# Altium PCB nema17-knockout.PcbDoc (part 1 of 3)
Units mm, origin at the board's own origin, x right, y up, seen from the top; angles counter-clockwise.
Board outline 42.3 x 42.32 mm, 2 copper layers (Top, Bottom), stack 0 mm thick; 130 components, 82 nets, 394 pads, 273 vias.
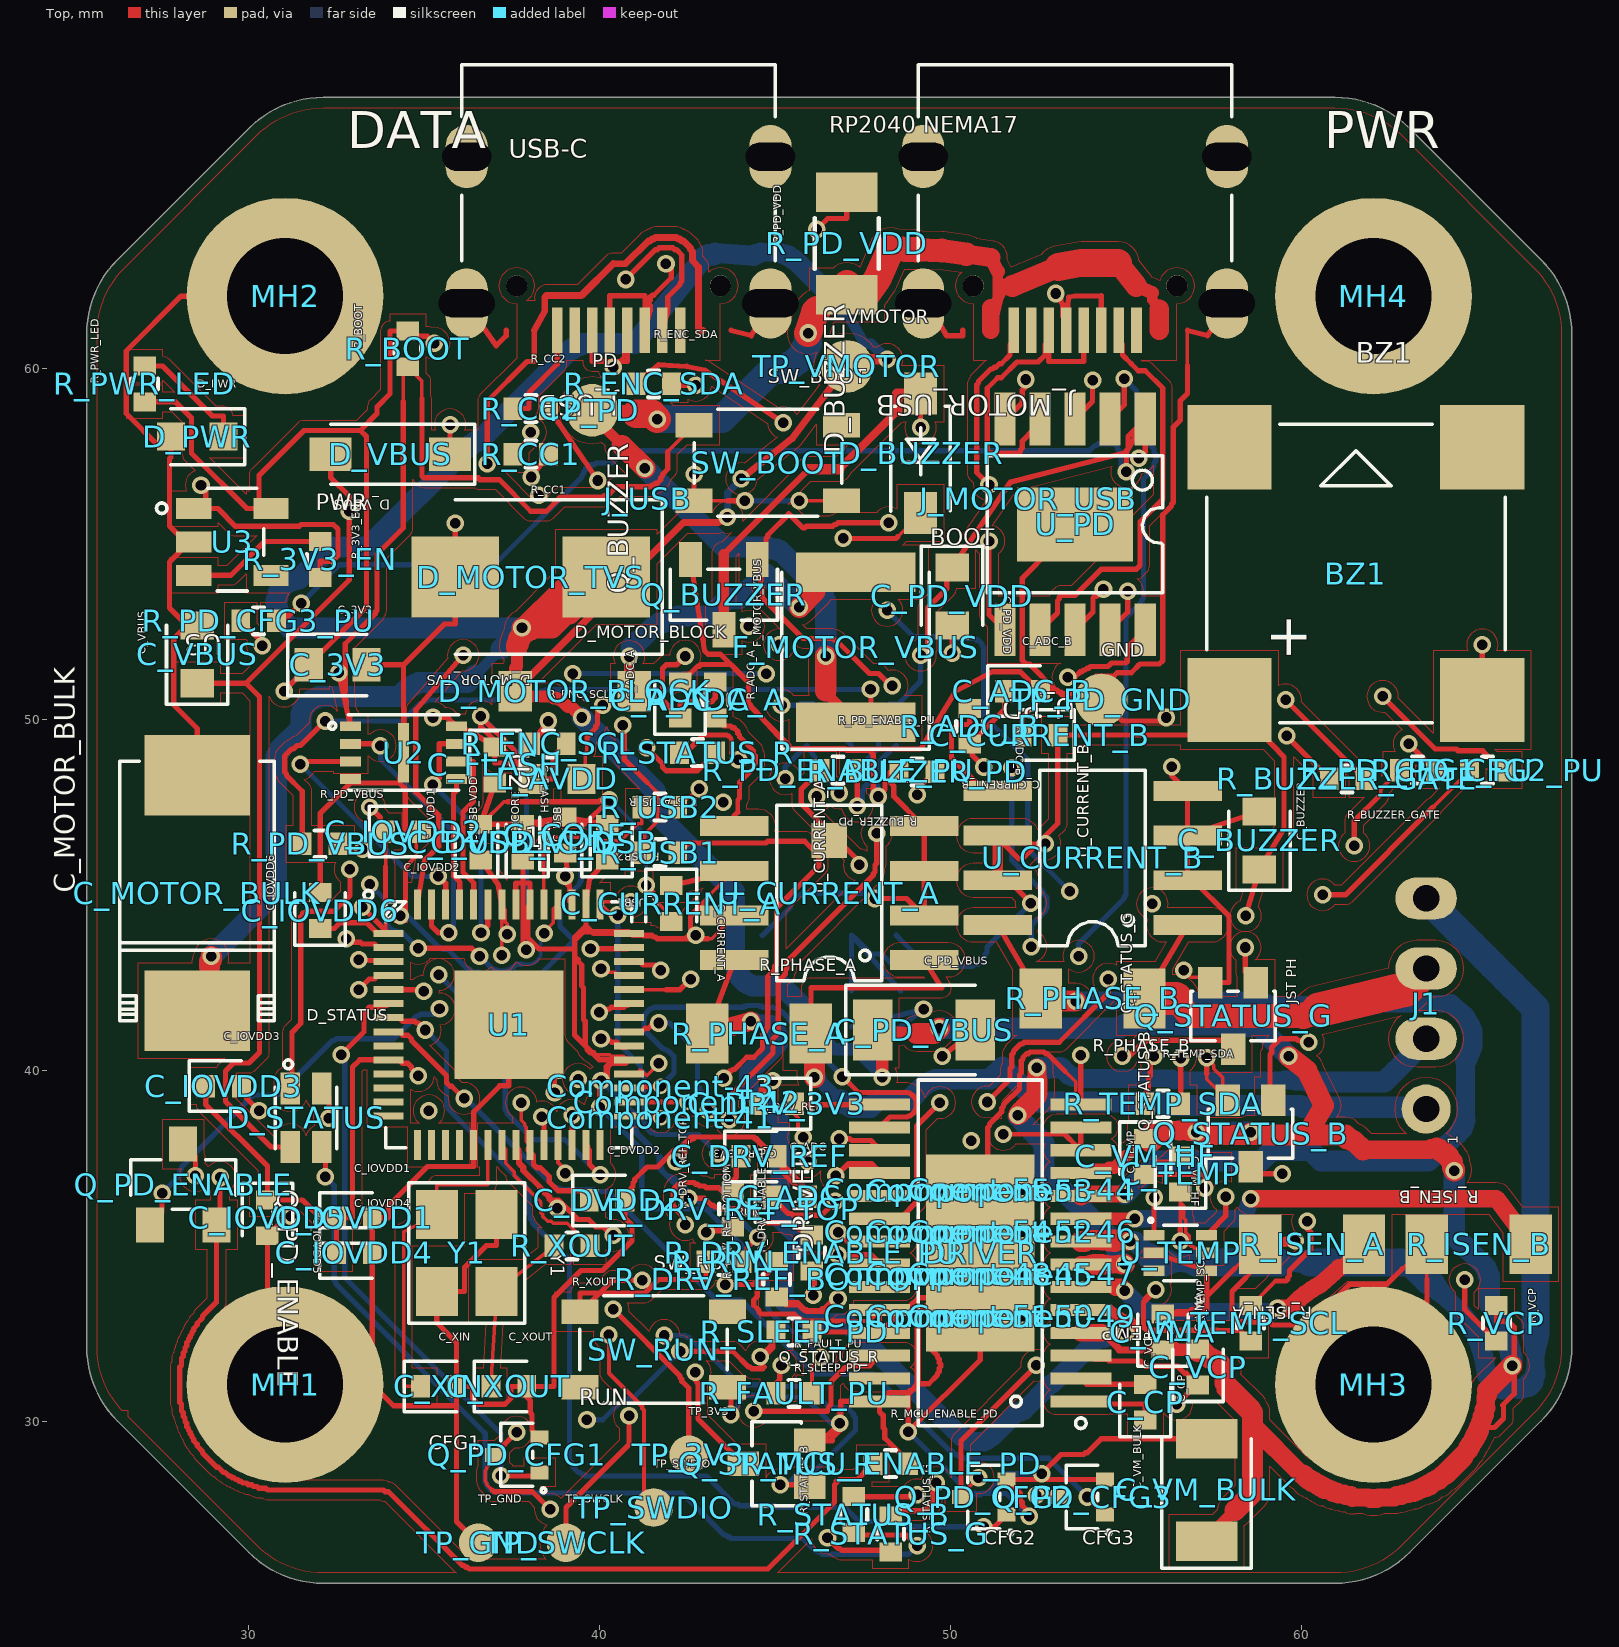
[diagram p0: Top view]
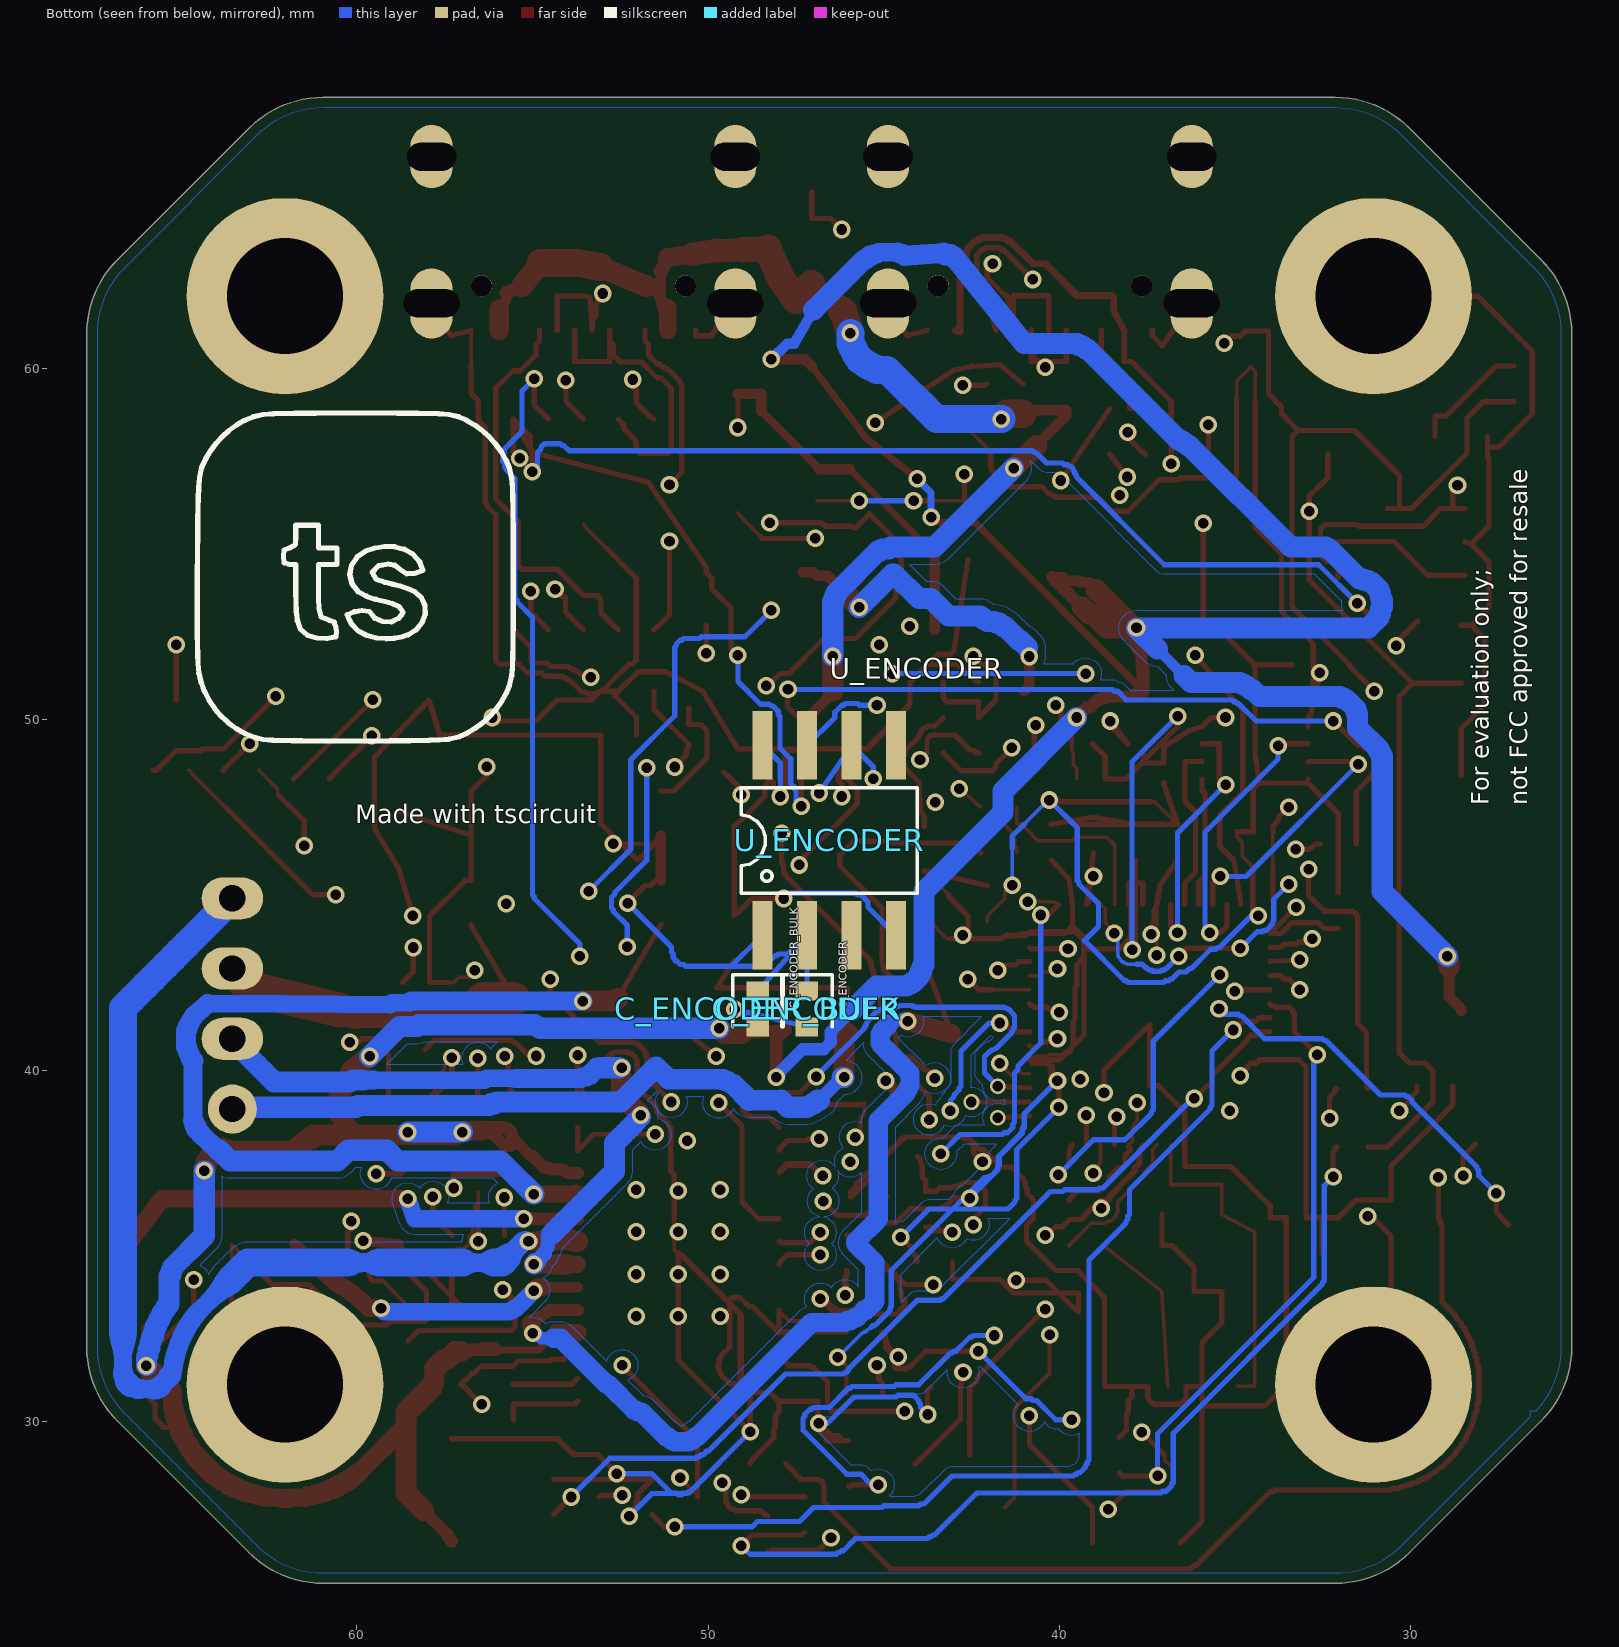
[diagram p1: Bottom view, seen from below]

## Layer stack, top to bottom

## Board outline
26.279,30.021 30.021,26.279 30.165,26.144 30.316,26.02 30.476,25.906 30.643,25.802 30.816,25.709 30.995,25.628 31.178,25.559 31.366,25.502 31.557,25.458 31.751,25.426 31.946,25.406 32.143,25.4 60.957,25.4 61.154,25.406 61.349,25.426 61.543,25.458 61.734,25.502 61.922,25.559 62.105,25.628 62.284,25.709 62.457,25.802 62.624,25.906 62.784,26.02 62.935,26.144 63.079,26.279 66.821,30.021 66.956,30.165 67.08,30.316 67.194,30.476 67.298,30.643 67.391,30.816 67.472,30.995 67.541,31.178 67.598,31.366 67.642,31.557 67.674,31.751 67.694,31.946 67.7,32.143 67.7,60.977 67.694,61.174 67.674,61.369 67.642,61.563 67.598,61.754 67.541,61.942 67.472,62.125 67.391,62.304 67.298,62.477 67.194,62.644 67.08,62.804 66.956,62.955 66.821,63.099 63.079,66.841 62.935,66.976 62.784,67.1 62.624,67.214 62.457,67.318 62.284,67.411 62.105,67.492 61.922,67.561 61.734,67.618 61.543,67.662 61.349,67.694 61.154,67.714 60.957,67.72 32.143,67.72 31.946,67.714 31.751,67.694 31.557,67.662 31.366,67.618 31.178,67.561 30.995,67.492 30.816,67.411 30.643,67.318 30.476,67.214 30.316,67.1 30.165,66.976 30.021,66.841 26.279,63.099 26.144,62.955 26.02,62.804 25.906,62.644 25.802,62.477 25.709,62.304 25.628,62.125 25.559,61.942 25.502,61.754 25.458,61.563 25.426,61.369 25.406,61.174 25.4,60.977 25.4,32.143 25.406,31.946 25.426,31.751 25.458,31.557 25.502,31.366 25.559,31.178 25.628,30.995 25.709,30.816 25.802,30.643 25.906,30.476 26.02,30.316 26.144,30.165 26.279,30.021

## Components (designator, comment, footprint, x,y, rotation, side; value= is the part's Value field where it differs from the comment)
BZ1 "" TSCIRCUIT-9.5997x9.5999mm 61.55,54.16 r0 top
C_3V3 "" TSCIRCUIT-2.4500x0.9500mm 32.55,51.56 r0 top
C_ADC "" TSCIRCUIT-1.5600x0.6400mm 45.425,36.41 r0 top
C_ADC_A "" TSCIRCUIT-0.6400x1.5600mm#1 42.3,50.56 r90 top
C_ADC_B "" TSCIRCUIT-1.5600x0.6400mm 52.05,50.81 r0 top
C_BUZZER "" TSCIRCUIT-0.9500x2.4500mm 58.8,46.56 r90 top
C_CORE "" TSCIRCUIT-0.6400x1.5600mm#1 39.025,46.71 r90 top
C_CP "" TSCIRCUIT-0.6400x1.5600mm#1 55.55,30.56 r90 top
C_CURRENT_A "" TSCIRCUIT-0.6400x1.5600mm#1 42.05,44.76 r270 top
C_CURRENT_B "" TSCIRCUIT-1.5600x0.6400mm 52.55,49.56 r180 top
C_DRV_3V3 "" TSCIRCUIT-1.5600x0.6400mm 45.05,39.06 r180 top
C_DRV_REF "" TSCIRCUIT-1.5600x0.6400mm 44.55,37.56 r0 top
C_DVDD1 "" TSCIRCUIT-0.6400x1.5600mm#1 36.625,46.51 r90 top
C_DVDD2 "" TSCIRCUIT-1.5600x0.6400mm 40.225,36.31 r0 top
C_ENCODER "" TSCIRCUIT-0.6400x1.5600mm#2 47.185,41.76 r90 bottom
C_ENCODER_BULK "" TSCIRCUIT-0.6400x1.5600mm#2 48.585,41.76 r90 bottom
C_FLASH "" TSCIRCUIT-0.6400x1.5600mm#1 37.025,48.71 r270 top
C_IOVDD1 "" TSCIRCUIT-1.5600x0.6400mm 33.025,35.81 r0 top
C_IOVDD2 "" TSCIRCUIT-1.5600x0.6400mm 34.425,46.81 r0 top
C_IOVDD3 "" TSCIRCUIT-1.5600x0.6400mm 29.3,39.56 r0 top
C_IOVDD4 "" TSCIRCUIT-1.5600x0.6400mm 33.025,34.81 r0 top
C_IOVDD5 "" TSCIRCUIT-0.6400x1.5600mm#1 30.55,35.81 r270 top
C_IOVDD6 "" TSCIRCUIT-0.6400x1.5600mm#1 32.05,44.56 r90 top
C_MOTOR_BULK "" TSCIRCUIT-3x9.0048mm 28.55,45.06 r90 top
C_PD_VBUS "" TSCIRCUIT-4.0500x1.7500mm 49.25,41.16 r0 top
C_PD_VDD "" TSCIRCUIT-0.9500x2.4500mm 50.05,53.51 r270 top
C_TEMP "" TSCIRCUIT-0.6400x1.5600mm#1 56.55,37.06 r90 top
C_USB "" TSCIRCUIT-0.6400x1.5600mm#1 40.225,46.51 r90 top
C_USB_VDD "" TSCIRCUIT-0.6400x1.5600mm#1 37.825,46.51 r90 top
C_VBUS "" TSCIRCUIT-0.9500x2.4500mm 28.55,51.86 r90 top
C_VCP "" TSCIRCUIT-0.6400x1.5600mm#1 57.05,31.56 r90 top
C_VM_BULK "" TSCIRCUIT-1.7500x4.0500mm 57.3,28.06 r90 top
C_VM_HF "" TSCIRCUIT-0.6400x1.5600mm#1 55.55,37.56 r270 top
C_VMA "" TSCIRCUIT-0.6400x1.5600mm#1 56.05,32.56 r90 top
C_XIN "" TSCIRCUIT-1.5600x0.6400mm 35.425,31.01 r0 top
C_XOUT "" TSCIRCUIT-1.5600x0.6400mm 37.425,31.01 r0 top
Component-41 "" TSCIRCUIT-0.4500x0.4500mm 41.75,38.659 r0 top
Component-42 "" TSCIRCUIT-0.4500x0.4500mm 42.5,39.109 r0 top
Component-43 "" TSCIRCUIT-0.4500x0.4500mm 41.75,39.56 r0 top
Component-44 "" TSCIRCUIT-0.5000x0.5000mm 52.05,36.61 r0 top
Component-45 "" TSCIRCUIT-0.5000x0.5000mm 50.85,34.21 r0 top
Component-46 "" TSCIRCUIT-0.5000x0.5000mm 52.05,35.41 r0 top
Component-47 "" TSCIRCUIT-0.5000x0.5000mm 52.05,34.21 r0 top
Component-48 "" TSCIRCUIT-0.5000x0.5000mm 49.65,34.21 r0 top
Component-49 "" TSCIRCUIT-0.5000x0.5000mm 52.05,33.01 r0 top
Component-50 "" TSCIRCUIT-0.5000x0.5000mm 50.85,33.01 r0 top
Component-51 "" TSCIRCUIT-0.5000x0.5000mm 49.65,33.01 r0 top
Component-52 "" TSCIRCUIT-0.5000x0.5000mm 50.85,35.41 r0 top
Component-53 "" TSCIRCUIT-0.5000x0.5000mm 50.85,36.588 r0 top
Component-54 "" TSCIRCUIT-0.5000x0.5000mm 49.65,35.41 r0 top
Component-55 "" TSCIRCUIT-0.5000x0.5000mm 49.65,36.61 r0 top
D_BUZZER "" TSCIRCUIT-0.9500x4.6000mm 49.15,57.585 r90 top
D_MOTOR_BLOCK "" TSCIRCUIT-4.3348x1.1500mm 39.3,50.81 r0 top
D_MOTOR_TVS "" TSCIRCUIT-6.8000x2.3000mm 38.05,54.06 r180 top
D_PWR "" TSCIRCUIT-2.2980x0.8000mm 28.55,58.06 r0 top
D_STATUS "" TSCIRCUIT-1.4502x2.5840mm 31.65,38.66 r0 top
D_VBUS "" TSCIRCUIT-4.6000x0.9500mm 34.05,57.56 r180 top
DRIVER "" TSCIRCUIT-7.4630x8.7931mm 50.85,34.81 r90 top
F_MOTOR_VBUS "" TSCIRCUIT-3.4000x5.4000mm 47.3,52.06 r90 top
J1 "" TSCIRCUIT-1.7500x7.3000mm 63.55,41.86 r90 top
J_MOTOR_USB "" TSCIRCUIT-9.8502x6.4982mm#1 53.55,63.685 r180 top
J_USB "" TSCIRCUIT-9.8502x6.4982mm#2 40.55,63.685 r180 top
L_AVDD "" TSCIRCUIT-2.1998x0.8640mm 38.8,48.31 r0 top
MH1 "" TSCIRCUIT-5.6000x5.6000mm 31.05,31.06 r0 top
MH2 "" TSCIRCUIT-5.6000x5.6000mm 31.05,62.06 r0 top
MH3 "" TSCIRCUIT-5.6000x5.6000mm 62.05,31.06 r0 top
MH4 "" TSCIRCUIT-5.6000x5.6000mm 62.05,62.06 r0 top
Q_BUZZER "" TSCIRCUIT-2.5499x3mm 43.55,53.56 r90 top
Q_PD_CFG1 "" TSCIRCUIT-1.8100x1.4000mm 37.65,29.06 r0 top
Q_PD_CFG2 "" TSCIRCUIT-1.8100x1.4000mm 50.95,27.86 r0 top
Q_PD_CFG3 "" TSCIRCUIT-1.8100x1.4000mm 53.75,27.86 r0 top
Q_PD_ENABLE "" TSCIRCUIT-2.6999x3.3000mm 28.15,36.76 r270 top
Q_STATUS_B "" TSCIRCUIT-2x2.7999mm 58.55,38.21 r90 top
Q_STATUS_G "" TSCIRCUIT-2x2.7999mm 58.05,41.56 r90 top
Q_STATUS_R "" TSCIRCUIT-2.7999x2mm 45.05,28.81 r0 top
R_3V3_EN "" TSCIRCUIT-0.6400x1.5600mm#1 32.05,54.56 r90 top
R_ADC_A "" TSCIRCUIT-0.6400x1.5600mm#1 43.3,50.56 r90 top
R_ADC_B "" TSCIRCUIT-0.6400x1.5600mm#1 50.55,49.81 r270 top
R_BOOT "" TSCIRCUIT-0.6400x1.5600mm#1 34.55,60.56 r90 top
R_BUZZER_GATE "" TSCIRCUIT-1.5600x0.6400mm 61.3,48.31 r0 top
R_BUZZER_PD "" TSCIRCUIT-1.5600x0.6400mm 49.05,48.51 r180 top
R_CC1 "" TSCIRCUIT-1.5600x0.6400mm 38.05,57.56 r0 top
R_CC2 "" TSCIRCUIT-1.5600x0.6400mm 38.05,58.86 r0 top
R_DRV_ENABLE_PU "" TSCIRCUIT-0.6400x1.5600mm#1 46.05,34.81 r90 top
R_DRV_REF_BOTTOM "" TSCIRCUIT-0.6400x1.5600mm#1 45.05,34.06 r90 top
R_DRV_REF_TOP "" TSCIRCUIT-0.6400x1.5600mm#1 43.8,36.06 r90 top
R_ENC_SCL "" TSCIRCUIT-1.5600x0.6400mm 38.55,49.31 r0 top
R_ENC_SDA "" TSCIRCUIT-1.5600x0.6400mm 41.55,59.56 r0 top
R_FAULT_PU "" TSCIRCUIT-1.5600x0.6400mm 45.55,30.81 r0 top
R_ISEN_A "" TSCIRCUIT-4.1651x1.7010mm 60.3,35.06 r180 top
R_ISEN_B "" TSCIRCUIT-4.1651x1.7010mm 65.05,35.06 r180 top
R_MCU_ENABLE_PD "" TSCIRCUIT-1.5600x0.6400mm 48.3,28.81 r0 top
R_PD_CFG1_PU "" TSCIRCUIT-1.5600x0.6400mm 63.3,48.56 r0 top
R_PD_CFG2_PU "" TSCIRCUIT-1.5600x0.6400mm 65.3,48.56 r0 top
R_PD_CFG3_PU "" TSCIRCUIT-1.5600x0.6400mm 30.3,52.81 r0 top
R_PD_ENABLE_PU "" TSCIRCUIT-1.5600x0.6400mm 46.8,48.56 r0 top
R_PD_VBUS "" TSCIRCUIT-1.5600x0.6400mm 32.05,46.46 r0 top
R_PD_VDD "" TSCIRCUIT-1.7500x4.0500mm 47.05,63.56 r90 top
R_PHASE_A "" TSCIRCUIT-4.1651x1.7010mm 44.55,41.06 r0 top
R_PHASE_B "" TSCIRCUIT-4.1651x1.7010mm 54.05,42.06 r0 top
R_PWR_LED "" TSCIRCUIT-0.6400x1.5600mm#1 27.05,59.56 r90 top
R_RUN "" TSCIRCUIT-1.5600x0.6400mm 43.55,34.56 r0 top
R_SLEEP_PD "" TSCIRCUIT-1.5600x0.6400mm 45.55,32.56 r0 top
R_STATUS_B "" TSCIRCUIT-0.6400x1.5600mm#1 47.25,27.36 r90 top
R_STATUS_G "" TSCIRCUIT-0.6400x1.5600mm#1 48.3,26.81 r90 top
R_STATUS_R "" TSCIRCUIT-1.5600x0.6400mm 42.8,49.06 r180 top
R_TEMP_SCL "" TSCIRCUIT-0.6400x1.5600mm#1 58.55,32.81 r90 top
R_TEMP_SDA "" TSCIRCUIT-1.5600x0.6400mm 56.05,39.06 r0 top
R_USB1 "" TSCIRCUIT-1.5600x0.6400mm 41.725,46.21 r180 top
R_USB2 "" TSCIRCUIT-1.5600x0.6400mm 41.725,47.51 r180 top
R_VCP "" TSCIRCUIT-0.6400x1.5600mm#1 65.55,32.81 r90 top
R_XOUT "" TSCIRCUIT-1.5600x0.6400mm 39.225,35.01 r0 top
SW_BOOT "" TSCIRCUIT-5.2500x2.8500mm 44.8,57.31 r0 top
SW_RUN "" TSCIRCUIT-5.2500x2.8500mm 41.55,32.06 r0 top
TP_3V3 "" TSCIRCUIT-1.1000x1.1000mm 42.55,29.06 r0 top
TP_GND "" TSCIRCUIT-1.1000x1.1000mm 36.55,26.56 r0 top
TP_PD "" TSCIRCUIT-1.5000x1.5000mm 39.8,58.81 r0 top
TP_PD_GND "" TSCIRCUIT-1.5000x1.5000mm 54.3,50.56 r0 top
TP_SWCLK "" TSCIRCUIT-1.1000x1.1000mm 39.05,26.56 r0 top
TP_SWDIO "" TSCIRCUIT-1.1000x1.1000mm 41.55,27.56 r0 top
TP_VMOTOR "" TSCIRCUIT-1.5000x1.5000mm 47.05,60.06 r90 top
U1 "" TSCIRCUIT-7.6999x7.7001mm 37.425,41.31 r0 top
U2 "" TSCIRCUIT-3.6150x1.7801mm 34.425,49.06 r270 top
U3 "" TSCIRCUIT-3.2001x2.5002mm 29.55,55.06 r180 top
U_CURRENT_A "" TSCIRCUIT-7.3604x4.3784mm 46.55,45.06 r90 top
U_CURRENT_B "" TSCIRCUIT-7.3604x4.3784mm 54.05,46.06 r90 top
U_ENCODER "" TSCIRCUIT-4.3784x7.3604mm 46.55,46.56 r0 bottom
U_PD "" TSCIRCUIT-4.6000x7.5002mm 53.55,55.56 r180 top
U_TEMP "" TSCIRCUIT-2.1000x1.3000mm 56.55,34.81 r180 top
Y1 "" TSCIRCUIT-2.9000x3.6000mm 36.225,34.81 r270 top

## Footprints (in the part's own frame and the unit in brackets; to place one, negate y for a bottom-side part, rotate by r counter-clockwise, add the part's x,y. Pads: shape width x height; smd on the part's side, far side on the other; paste and mask are expansions set on the pad)
TSCIRCUIT-0.4500x0.4500mm [mm]
TSCIRCUIT-0.5000x0.5000mm [mm]
TSCIRCUIT-0.6400x1.5600mm#1 [mm]
  rect 0.54x0.64 smd: 1(-0.51,0) 2(0.51,0)
  silkscreen extent -0.98,-0.72 0.51,0.72
TSCIRCUIT-0.6400x1.5600mm#2 [mm]
  rect 0.54x0.64 smd: 1(0.51,0) 2(-0.51,0)
  silkscreen extent -0.51,-0.72 0.98,0.72
TSCIRCUIT-0.9500x2.4500mm [mm]
  rect 0.8x0.95 smd: 1(-0.825,0) 2(0.825,0)
  silkscreen extent -1.43,-0.87 0.82,0.88
TSCIRCUIT-0.9500x4.6000mm [mm]
  rect 1.2x0.95 smd: 1(-1.7,0) 2(1.7,0)
  silkscreen extent -1.64,-0.85 1.35,0.85
TSCIRCUIT-1.1000x1.1000mm [mm]
  round 1.1 smd: 1(0,0)
TSCIRCUIT-1.4502x2.5840mm [mm]
  rect 0.55x0.917 smd: 1(-0.45,0.834) 2(0.45,0.834) 3(0.45,-0.834) 4(-0.45,-0.834)
  silkscreen extent -0.88,-0.88 0.88,1.65
TSCIRCUIT-1.5000x1.5000mm [mm]
  round 1.5 smd: 1(0,0)
TSCIRCUIT-1.5600x0.6400mm [mm]
  rect 0.54x0.64 smd: 1(-0.51,0) 2(0.51,0)
  silkscreen extent -0.98,-0.72 0.51,0.72
TSCIRCUIT-1.7500x4.0500mm [mm]
  rect 1.125x1.75 smd: 1(-1.462,0) 2(1.463,0)
  silkscreen extent -2.22,-1.28 1.46,1.27
TSCIRCUIT-1.7500x7.3000mm [mm]
  round 1.4 hole 0.75: 1(-2.95,0)
  oval 1.2x1.75 hole 0.75: 2(-0.95,0) 3(1.05,0) 4(3.05,0)
TSCIRCUIT-1.8100x1.4000mm [mm]
  rect 0.51x0.4 smd: 1(0.65,-0.5) 2(0.65,0.5) 3(-0.65,0)
  silkscreen extent -0.45,-1.08 0.83,0.9
TSCIRCUIT-2.1000x1.3000mm [mm]
  rect 0.6x0.3 smd: 1(0.75,-0.5) 2(0.75,0) 3(0.75,0.5) 4(-0.75,0.5) 5(-0.75,0) 6(-0.75,-0.5)
  silkscreen extent -0.48,-0.99 0.9,0.79
TSCIRCUIT-2.1998x0.8640mm [mm]
  rect 0.8x0.864 smd: 1(-0.7,0) 2(0.7,0)
TSCIRCUIT-2.2980x0.8000mm [mm]
  rect 0.8x0.8 smd: 1(-0.749,0) 2(0.749,0)
  silkscreen extent -0.75,-0.8 1.35,0.8
TSCIRCUIT-2.4500x0.9500mm [mm]
  rect 0.8x0.95 smd: 1(-0.825,0) 2(0.825,0)
  silkscreen extent -1.43,-0.87 0.82,0.87
TSCIRCUIT-2.5499x3mm [mm]
  rect 1x0.65 smd: 1(1,-0.95) 2(1,0.95) 3(-1,0)
  silkscreen extent -0.73,-1.53 0.73,1.53
TSCIRCUIT-2.6999x3.3000mm [mm]
  rect 1x0.8 smd: 1(1.15,-0.95) 2(1.15,0.95) 3(-1.15,0)
  silkscreen extent -0.7,-1.5 0.7,1.5
TSCIRCUIT-2.7999x2mm [mm]
  rect 0.9x0.7 smd: 1(0.95,0.65) 2(0.95,-0.65) 3(-0.95,0)
  silkscreen extent -0.7,-1.2 0.7,1.2
TSCIRCUIT-2.9000x3.6000mm [mm]
  rect 1.4x1.2 smd: 1(-1.1,-0.85) 2(1.1,-0.85) 3(1.1,0.85) 4(-1.1,0.85)
  silkscreen extent -2,-1.65 2,1.65
TSCIRCUIT-2x2.7999mm [mm]
  rect 0.9x0.7 smd: 1(0.95,0.65) 2(0.95,-0.65) 3(-0.95,0)
  silkscreen extent -0.7,-1.2 0.7,1.2
TSCIRCUIT-3.2001x2.5002mm [mm]
  rect 1x0.6 smd: 1(1.1,-0.95) 2(1.1,0) 3(1.1,0.95) 4(-1.1,0.95) 5(-1.1,-0.95)
  silkscreen extent -0.89,-1.52 2.16,1.4
TSCIRCUIT-3.4000x5.4000mm [mm]
  rect 1.125x3.4 smd: 1(-2.137,0) 2(2.138,0)
  silkscreen extent -2.9,-2.1 2.14,2.1
TSCIRCUIT-3.6150x1.7801mm [mm]
  rect 0.28x0.6 smd: 1(-0.75,-1.507) 2(-0.25,-1.507) 3(0.25,-1.507) 4(0.75,-1.507) 5(0.75,1.507) 6(0.25,1.507) 7(-0.25,1.507) 8(-0.75,1.507)
  rect 1.7x0.3 smd: 9(0,0)
  silkscreen extent -1.08,-2.13 1.08,1.58
TSCIRCUIT-3x9.0048mm [mm]
  rect 2.3x3 smd: 1(-3.352,0) 2(3.352,0)
  silkscreen extent -3.64,-2.2 3.75,2.2
TSCIRCUIT-4.0500x1.7500mm [mm]
  rect 1.125x1.75 smd: 1(-1.462,0) 2(1.463,0)
  silkscreen extent -2.22,-1.28 1.46,1.27
TSCIRCUIT-4.1651x1.7010mm [mm]
  rect 1.208x1.701 smd: 1(-1.479,0) 2(1.479,0)
TSCIRCUIT-4.3348x1.1500mm [mm]
  rect 0.95x1.15 smd: 1(-1.692,0) 2(1.692,0)
TSCIRCUIT-4.3784x7.3604mm [mil]
  rect 22.38x76.78 smd: 1(75,106.5) 2(25,106.5) 3(-25,106.5) 4(-75,106.5) 5(-75,-106.5) 6(-25,-106.5) 7(25,-106.5) 8(75,-106.5)
  silkscreen extent -98,-59 98,59
TSCIRCUIT-4.6000x0.9500mm [mm]
  rect 1.2x0.95 smd: 1(-1.7,0) 2(1.7,0)
  silkscreen extent -2.4,-0.85 1.7,0.85
TSCIRCUIT-4.6000x7.5002mm [mm]
  rect 0.6x1.5 smd: 1(-2,-3) 2(-1,-3) 3(0,-3) 4(1,-3) 5(2,-3) 6(2,3) 7(1,3) 8(0,3) 9(-1,3) 10(-2,3)
  rect 3.3x2.1 smd: 11(0,0)
  silkscreen extent -2.5,-1.95 2.5,1.95
TSCIRCUIT-5.2500x2.8500mm [mm]
  rect 1.05x0.7 smd: 1(-2.1,1.075) 2(2.1,1.075) 3(-2.1,-1.075) 4(2.1,-1.075)
  silkscreen extent -2.1,-1.52 2.1,1.53
TSCIRCUIT-5.6000x5.6000mm [mm]
  round 5.6 hole 3.3: 1(0,0)
TSCIRCUIT-6.8000x2.3000mm [mm]
  rect 2.5x2.3 smd: 1(-2.15,0) 2(2.15,0)
  silkscreen extent -3.75,-2.2 2.15,2.2
TSCIRCUIT-7.3604x4.3784mm [mil]
  rect 22.38x76.78 smd: 1(-75,-106.5) 2(-25,-106.5) 3(25,-106.5) 4(75,-106.5) 5(75,106.5) 6(25,106.5) 7(-25,106.5) 8(-75,106.5)
  silkscreen extent -98,-59 98,59
TSCIRCUIT-7.4630x8.7931mm [mm]
  rect 0.343x1.731 smd: 1(-4.225,-2.866) 2(-3.575,-2.866) 3(-2.925,-2.866) 4(-2.275,-2.866) 5(-1.625,-2.866) 6(-0.975,-2.866) 7(-0.325,-2.866) 8(0.325,-2.866) 9(0.975,-2.866) 10(1.625,-2.866) 11(2.275,-2.866) 12(2.925,-2.866) 13(3.575,-2.866) 14(4.225,-2.866) 15(4.225,2.866) 16(3.575,2.866) 17(2.925,2.866) 18(2.275,2.866) 19(1.625,2.866) 20(0.975,2.866) 21(0.325,2.866) 22(-0.325,2.866) 23(-0.975,2.866) 24(-1.625,2.866) 25(-2.275,2.866) 26(-2.925,2.866) 27(-3.575,2.866) 28(-4.225,2.866)
  rect 5.6x3.1 smd: 29(0,0)
  silkscreen extent -5,-3.02 4.93,1.77
TSCIRCUIT-7.6999x7.7001mm [mm]
  rect 0.85x0.2 smd: 1(-3.425,2.6) 2(-3.425,2.2) 3(-3.425,1.8) 4(-3.425,1.4) 5(-3.425,1) 6(-3.425,0.6) 7(-3.425,0.2) 8(-3.425,-0.2) 9(-3.425,-0.6) 10(-3.425,-1) 11(-3.425,-1.4) 12(-3.425,-1.8) 13(-3.425,-2.2) 14(-3.425,-2.6) 29(3.425,-2.6) 30(3.425,-2.2) 31(3.425,-1.8) 32(3.425,-1.4) 33(3.425,-1) 34(3.425,-0.6) 35(3.425,-0.2) 36(3.425,0.2) 37(3.425,0.6) 38(3.425,1) 39(3.425,1.4) 40(3.425,1.8) 41(3.425,2.2) 42(3.425,2.6)
  rect 0.2x0.85 smd: 15(-2.6,-3.425) 16(-2.2,-3.425) 17(-1.8,-3.425) 18(-1.4,-3.425) 19(-1,-3.425) 20(-0.6,-3.425) 21(-0.2,-3.425) 22(0.2,-3.425) 23(0.6,-3.425) 24(1,-3.425) 25(1.4,-3.425) 26(1.8,-3.425) 27(2.2,-3.425) 28(2.6,-3.425) 43(2.6,3.425) 44(2.2,3.425) 45(1.8,3.425) 46(1.4,3.425) 47(1,3.425) 48(0.6,3.425) 49(0.2,3.425) 50(-0.2,3.425) 51(-0.6,3.425) 52(-1,3.425) 53(-1.4,3.425) 54(-1.8,3.425) 55(-2.2,3.425) 56(-2.6,3.425)
  rect 3.1x3.1 smd: 57(0,0)
  silkscreen extent -4.13,-3.5 3.5,3.83
TSCIRCUIT-9.5997x9.5999mm [mm]
  rect 2.4x2.4 smd: 1(-3.6,-3.6) 2(3.6,-3.6) 3(3.6,3.6) 4(-3.6,3.6)
  silkscreen extent -4.25,-4.25 4.25,4.25
TSCIRCUIT-9.8502x6.4982mm#1 [mm]
  oval 1.2x2 hole 0.8 slot 1.6 at 0 deg: 1(-4.325,1.831) 2(4.325,1.831)
  oval 1.2x1.8 hole 0.8 slot 1.4 at 0 deg: 3(-4.325,-2.349) 4(4.325,-2.349)
  rect 1x1 smd: 5(7,17.125) 6(7,17.125) 15(7,17.125) 16(7,17.125)
  rect 0.3x1.3 smd: 7(-1.75,2.599) 8(-1.25,2.599) 9(-0.75,2.599) 10(-0.25,2.599) 11(0.25,2.599) 12(0.75,2.599) 13(1.25,2.599) 14(1.75,2.599)
  round 0.6 hole 0.6 unplated: NPTH-3(-2.9,1.331) NPTH-4(2.9,1.331)
  silkscreen extent -4.47,-4.97 4.47,0.61
TSCIRCUIT-9.8502x6.4982mm#2 [mm]
  oval 1.2x2 hole 0.8 slot 1.6 at 0 deg: 13(-4.325,1.831) 14(4.325,1.831)
  oval 1.2x1.8 hole 0.8 slot 1.4 at 0 deg: 15(-4.325,-2.349) 16(4.325,-2.349)
  rect 1x1 smd: 17(-6,17.125) 18(-6,17.125) 27(-6,17.125) 28(-6,17.125)
  rect 0.3x1.3 smd: 19(-1.75,2.599) 20(-1.25,2.599) 21(-0.75,2.599) 22(-0.25,2.599) 23(0.25,2.599) 24(0.75,2.599) 25(1.25,2.599) 26(1.75,2.599)
  round 0.6 hole 0.6 unplated: NPTH-1(-2.9,1.331) NPTH-2(2.9,1.331)
  silkscreen extent -4.47,-4.97 4.47,0.61

## Via types
v1: diameter 0.5, hole 0.3, Top to Bottom, 267 vias
v2: diameter 0.45, hole 0.3, Top to Bottom, 6 vias

## Nets (pads, with @x,y where several pads share a name; then routed paths per layer and width w, separated by ;. In a path a pad name is that pad's centre, name@x,y a point inside that pad or via, vN(x,y) a via of type N, cw(c..) or ccw(c..) an arc to the next point about the centre after c; other vN are vias at no path point)
ADC_VREF: C_ADC.1 L_AVDD.2 U1.43 | length 35.3
  Top w0.1: L_AVDD.2@39.5,48.31 39.5,48.61 39.6,48.71 39.6,49.06 39.65,49.11 39.65,49.31 ; U1.43@40.025,44.735 40.15,44.81 v1(40.9,44.81)
  Top w0.15: 39.65,49.31 39.65,49.51 39.9,49.76 39.9,49.81 39.95,49.86 39.95,50.26 v1(40.1,50.41) ; U1.43@40.025,44.735 40.325,44.435 v1(40.525,44.435) ; C_ADC.1@44.915,36.41 45.025,36.285 45.375,35.935 45.475,35.935 45.525,35.885 46.325,35.885 v1(46.725,36.285)
  Mid1 w0.15: v1(43.375,37.635) 43.675,37.635 44.225,37.085 45.625,37.085 46.025,36.685 46.325,36.685 46.525,36.485 46.725,36.485 46.825,36.385 v1(46.725,36.285)
  Mid2 w0.1: v1(40.9,44.81) 40.9,45.21
  Mid2 w0.15: v1(40.1,50.41) 40.35,50.41 42.15,52.21 42.2,52.21 42.25,52.26 43.15,52.26 43.95,53.06 44,53.06 44.05,53.11 44.45,53.11 44.5,53.06 44.55,53.06 44.95,52.66 45.2,52.66 45.3,52.56 45.4,52.56 45.55,52.41 45.55,52.31 45.6,52.26 45.6,51.46 42.4,48.26 42.4,47.11 40.9,45.61 40.9,45.21
  Bottom w0.15: v1(40.525,44.435) 40.525,40.785 41.175,40.135 41.175,40.035 41.275,39.935 41.275,38.535 41.325,38.485 41.325,38.385 41.475,38.235 41.575,38.235 41.625,38.185 42.825,38.185 v1(43.375,37.635)
BUZZER_GATE: Q_BUZZER.1 R_BUZZER_GATE.2 R_BUZZER_PD.1 | length 31.5
  Top w0.15: v1(48.25,55.61) 46.8,55.61 46.75,55.56 46.7,55.56 46.65,55.51 45.9,55.51 45.85,55.46 45.8,55.46 45.4,55.86 44.8,55.26 44.8,55.21 44.75,55.16 44.75,54.81 Q_BUZZER.1@44.5,54.56 44.5,54.26 44.6,54.16 44.6,53.81 44.65,53.76 44.65,53.56 44.65,53.46 45.8,52.31 46.65,52.31 46.7,52.26 46.75,52.26 47.7,51.31 47.95,51.31 48.3,50.96 v1(48.35,50.96) ; v1(49.05,47.86) 49.05,48.01 49.45,48.41 R_BUZZER_PD.1@49.56,48.51 ; v1(59.55,50.56) 61.7,48.41 R_BUZZER_GATE.2@61.81,48.31
  Mid1 w0.15: v1(48.25,55.61) 54.5,55.61 v1(59.55,50.56)
  Mid2 w0.15: v1(48.35,50.96) 48.35,49.71 48.85,49.21 49,49.06 49,47.91 v1(49.05,47.86)
BUZZER_PWM: R_BUZZER_GATE.1 U1.27 | length 40.8
  Top w0.15: U1.27@39.625,37.885 39.675,37.835 39.675,37.785 39.725,37.735 39.725,37.335 v1(40.025,37.035) ; v1(59.575,49.535) 60.675,48.435 R_BUZZER_GATE.1@60.79,48.31
  Mid1 w0.15: v1(45.125,52.135) 46.075,52.135 46.175,52.235 46.275,52.235 46.325,52.285 49.675,52.285 49.725,52.335 49.775,52.335 49.825,52.385 56.725,52.385 v1(59.575,49.535)
  Mid2 w0.15: v1(35.425,42.735) 36.175,43.485 36.175,44.135 36.275,44.235 36.275,44.285 39.825,47.835 39.825,47.885 39.875,47.935 39.875,47.985 40.025,48.135 40.125,48.135 40.175,48.185 40.225,48.185 40.725,48.685 40.775,48.685 40.825,48.735 41.625,48.735 44.325,51.435 44.325,51.635 44.375,51.685 44.375,51.785 44.525,51.935 44.575,51.935 44.625,51.985 44.975,51.985 v1(45.125,52.135)
  Bottom w0.15: v1(35.425,42.735) 37.325,40.835 37.325,38.885 37.375,38.835 37.375,38.785 38.125,38.035 39.025,38.035 v1(40.025,37.035)
BUZZER_SINK: BZ1.2 D_BUZZER.2 Q_BUZZER.3 | length 31
  Top w0.15: v1(49.15,58.32) D_BUZZER.2@49.15,59.285 ; BZ1.2@65.15,50.56 v1(65.15,52.13)
  Top w0.175: 43.55,54.713 45.971,57.134
  Top w0.225: 46.834,57.134 48.488,58.789
  Top w0.3: Q_BUZZER.3@43.55,52.56 43.55,54.713 ; 45.971,57.134 46.834,57.134 ; 48.488,58.789 48.488,59.285 D_BUZZER.2@49.15,59.285
  Mid1 w0.15: v1(49.15,58.32) 58.96,58.32 v1(65.15,52.13)
CC1: J_USB.20 R_CC1.1 | length 10.6
  Top w0.15: R_CC1.1@37.54,57.56 37.65,57.635 38.05,58.035 v1(38.05,58.185) ; v1(40.75,62.535) 41.6,63.385 41.65,63.385 41.7,63.435 42.1,63.435 42.15,63.385 42.2,63.385 42.35,63.235 42.35,62.485 42.3,62.435 42.3,62.385 41.95,62.035 41.95,61.635 J_USB.20@41.8,61.085
  Mid2 w0.15: v1(38.05,58.185) 39.2,59.335 39.2,60.085 39.25,60.135 39.25,60.235 39.3,60.285 39.3,60.335 40.75,62.185 v1(40.75,62.535)
CC2: J_USB.26 R_CC2.1 | length 3
  Top w0.15: R_CC2.1@37.54,58.86 37.997,58.86 37.997,59.317 38.8,60.12 J_USB.26@38.8,61.086
CURRENT_A_ADC: C_ADC_A.1 R_ADC_A.2 U1.40 | length 35.4
  Top w0.15: U1.40@40.85,43.11 41.15,43.11 41.25,43.01 41.6,43.01 v1(41.75,42.86) ; v1(42.45,51.81) 42.2,51.56 41.9,51.56 41.8,51.46 41.8,50.56 42.2,50.16 C_ADC_A.1@42.3,50.05 42.3,50.507 43.193,50.507 43.3,50.613 R_ADC_A.2@43.3,51.07
  Mid1 w0.15: v1(42.45,51.81) 44.05,51.81 44.95,52.71 45.75,52.71 45.8,52.76 45.95,52.76 46.3,53.11 v1(48.2,53.11)
  Mid2 w0.15: v1(41.75,42.86) 42.2,43.31 42.35,43.31 43.05,43.31 43.15,43.41 43.2,43.41 43.4,43.61 49.55,43.61 50.05,44.11 50.1,44.11 50.15,44.16 50.2,44.16 50.25,44.21 51.9,44.21 51.95,44.26 52,44.26 52.05,44.31 52.6,44.31 v1(53.4,45.11)
  Bottom w0.15: v1(48.2,53.11) 48.95,52.36 50.2,52.36 50.25,52.31 50.7,52.31 50.75,52.26 50.8,52.26 50.9,52.16 50.9,52.11 50.95,52.06 50.95,50.11 52.2,48.86 52.2,46.31 v1(53.4,45.11)
CURRENT_A_OUT: R_ADC_A.1 U_CURRENT_A.5 | length 4
  Top w0.125: 43.945,47.365 43.945,47.715
  Top w0.14: 43.945,47.715 43.995,47.765
  Top w0.15: R_ADC_A.1@43.3,50.05 43.395,49.965 43.545,49.815 43.745,49.815 43.795,49.765 43.845,49.765 43.945,49.665 43.945,49.615 43.995,49.565 43.995,49.515 44.045,49.465 44.395,49.115 44.395,49.015 44.445,48.965 44.445,48.765 44.395,48.715 44.395,48.615 43.995,48.215 43.995,47.965 43.995,47.765 ; U_CURRENT_A.5@43.845,46.965 43.845,47.265 43.945,47.365
CURRENT_A_WINDING: J1.1 R_PHASE_A.2 U_CURRENT_A.1 | length 26
  Top w0.15: R_PHASE_A.2@46.029,41.06 46.029,42.36 49.755,42.36 U_CURRENT_A.1@49.255,43.155
  Top w0.6: R_PHASE_A.2@46.029,41.06 46.079,41.01 46.079,40.96 46.129,40.91 v1(46.129,39.81)
  Bottom w0.38: v1@46.179,39.81 46.829,39.16
  Bottom w0.565: 49.279,39.61 49.329,39.61 49.429,39.71
  Bottom w0.57: 49.429,39.71 49.529,39.71 49.579,39.76
  Bottom w0.59: 47.929,39.16 48.829,39.16 ; 49.579,39.76 51.129,39.76
  Bottom w0.595: 51.129,39.76 51.479,40.11
  Bottom w0.6: v1(46.129,39.81) v1@46.179,39.81 ; 46.829,39.16 46.879,39.16 46.979,39.06 47.029,39.06 47.079,39.01 47.129,39.01 47.179,38.96 47.729,38.96 47.929,39.16 ; 48.829,39.16 49.279,39.61 ; 51.479,40.11 52.479,39.11 56.029,39.11 56.079,39.06 56.179,39.06 56.229,39.01 59.979,39.01 60.029,38.96 61.579,38.96 63.429,38.96 J1.1@63.55,38.91
CURRENT_B_ADC: C_ADC_B.1 R_ADC_B.2 U1.41 | length 18.1
  Top w0.15: v1(39.75,43.475) 40.8,43.475 U1.41@40.85,43.51 ; v1(50.95,48.65) 50.625,48.975 50.625,49.15 50.55,49.225 R_ADC_B.2@50.55,49.3 51.54,50.29 C_ADC_B.1@51.54,50.81
  Mid1 w0.15: v1(43.525,47.65) 44.1,47.075 47.4,47.075 47.425,47.1 47.525,47.1 47.55,47.125 47.575,47.125 47.625,47.175 47.65,47.175 47.825,47.35 48,47.35 48.025,47.375 48.1,47.375 48.125,47.4 49.1,47.4 49.125,47.425 49.225,47.425 49.25,47.45 49.275,47.45 49.325,47.5 49.35,47.5 49.45,47.6 50.25,48.4 50.65,48.4 50.9,48.65 v1(50.95,48.65)
  Mid2 w0.15: v1(39.75,43.475) 40.275,44 40.7,44 41.9,45.2 43.525,46.825 v1(43.525,47.65)
CURRENT_B_OUT: R_ADC_B.1 U_CURRENT_B.5 | length 3.5
  Top w0.15: R_ADC_B.1@50.55,50.32 50.55,49.863 50.207,49.863 50.028,49.684 50.028,48.908 50.971,47.965 U_CURRENT_B.5@51.345,47.965
CURRENT_B_WINDING: J1.3 R_PHASE_B.2 U_CURRENT_B.1 | length 11
  Top w0.15: R_PHASE_B.2@55.529,42.06 U_CURRENT_B.1@56.755,44.155
  Top w0.685: 56.8,41.56 60.05,41.56
  Top w0.69: 56.419,42.06 56.8,41.56
  Top w0.755: 60.05,41.56 60.496,41.73
  Top w0.945: R_PHASE_B.2@55.529,42.06 56.419,42.06
  Top w1: 60.496,41.73 62.96,42.32 J1.3@63.55,42.91
DRIVER_DIR: DRIVER.20 U1.30 | length 14.7
  Top w0.15: U1.30@40.85,39.11 v2(42.5,39.109) ; DRIVER.20@47.985,35.785 48.559,35.785 49.037,36.262 49.037,38.428 v1(49.702,39.093)
  Mid1 w0.15: v2(42.5,39.109) 42.5,39.929 42.854,40.282 48.513,40.282 v1(49.702,39.093)
  other v2: 42.5,39.109
DRIVER_FAULT: DRIVER.18 R_FAULT_PU.1 U1.35 | length 19.7
  Top w0.15: U1.35@40.85,41.11 41.2,41.11 41.3,41.21 41.4,41.21 41.55,41.36 v1(41.7,41.36) ; R_FAULT_PU.1@45.04,30.81 45.04,31.11 45.14,31.21 45.14,31.51 45.19,31.56 v1(45.19,31.61) ; v1(46.74,37.01) 47.04,37.31 47.74,37.31 47.89,37.16 DRIVER.18@47.984,37.085 47.9,37.21 47.75,37.36 47.1,37.36 v1(46.74,37.01)
  Mid1 w0.15: v1(43.1,38.86) 43.2,38.96 43.25,38.96 43.55,39.26 45.3,39.26 46.4,38.16 46.4,37.91 46.45,37.86 46.45,37.81 46.6,37.66 46.65,37.66 46.7,37.61 46.85,37.61 47.05,37.41 47.05,37.31 v1(46.74,37.01)
  Mid2 w0.15: v1(45.19,31.61) 45.19,34.26 45.99,35.06 45.99,35.11 46.09,35.21 46.09,36.21 46.29,36.41 46.29,36.46 46.34,36.51 46.34,36.56 46.44,36.66 46.49,36.66 46.74,36.91 v1(46.74,37.01)
  Bottom w0.15: v1(41.7,41.36) 42,41.36 42.8,40.56 42.8,39.56 42.85,39.51 42.85,39.46 43,39.31 43,39.26 43.1,39.16 v1(43.1,38.86)
DRIVER_RESET: DRIVER.16 U1.31 | length 14.1
  Top w0.135: 49,38.86 49,38.91 49.025,38.935 ; 49,39.21 49,39.16 49.025,39.135
  Top w0.14: 47.375,39.385 48.775,39.385 48.8,39.36 48.85,39.36 ; 48.775,38.685 48.8,38.71 48.85,38.71 ; 49.025,38.935 49.025,39.135
  Top w0.145: v1(46.925,39.835) 47.375,39.385 ; DRIVER.16@48.025,38.435 48.275,38.685 48.775,38.685 ; 48.85,38.71 48.925,38.785 48.95,38.785
  Top w0.15: U1.31@40.85,39.51 v2(41.75,39.56) ; DRIVER.16@47.984,38.385 DRIVER.16@48.025,38.435 ; 48.85,39.36 48.9,39.31 48.925,39.31 48.95,39.285 48.95,39.26 49,39.21 ; 48.95,38.785 48.95,38.81 49,38.86
  Bottom w0.135: 41.275,41.235 41.275,41.51 ; 41.875,40.61 41.9,40.585 41.925,40.585
  Bottom w0.14: 41.3,41.185 41.325,41.16 41.325,41.135 ; 41.825,40.635 41.85,40.61 41.875,40.61 ; 42.125,39.935 42.125,40.41
  Bottom w0.145: 41.275,41.235 41.3,41.21 41.3,41.185 ; 41.925,40.585 41.95,40.56 41.975,40.56
  Bottom w0.15: 41.275,41.51 41.275,41.56 41.3,41.585 41.3,41.61 41.45,41.76 41.475,41.76 41.5,41.785 41.55,41.785 41.575,41.81 44.1,41.81 44.125,41.835 44.175,41.835 44.2,41.86 44.55,41.86 44.575,41.835 44.625,41.835 44.65,41.81 44.95,41.81 44.975,41.785 45.025,41.785 45.05,41.76 45.075,41.76 45.1,41.735 45.125,41.735 45.175,41.685 45.2,41.685 45.4,41.485 45.4,41.46 45.475,41.385 45.475,41.36 45.5,41.335 45.5,41.31 45.525,41.285 45.525,41.26 45.55,41.235 45.55,41.21 46.8,39.96 v1(46.925,39.835) ; 41.325,41.135 41.35,41.11 41.35,41.085 41.8,40.635 41.825,40.635 ; v2(41.75,39.56) 42.125,39.935 ; 41.975,40.56 42.125,40.41
  other v2: 41.75,39.56
DRIVER_STEP: DRIVER.22 U1.29 | length 19.8
  Top w0.15: U1.29@40.85,38.71 v2(41.75,38.659) ; v1(46.8,34.759) 47.05,34.759 47.75,34.759 47.9,34.609 DRIVER.22@47.984,34.485
  Mid1 w0.15: v2(41.75,38.659) 41.75,38.909 41.35,39.309 41.35,39.359 41.3,39.409 41.3,39.559 41.3,39.959 41.25,40.009 41.25,40.409 41.3,40.459 41.3,40.509 41.4,40.609 41.45,40.609 41.5,40.659 41.9,40.659 41.95,40.609 42,40.609 42.05,40.559 48.65,40.559 48.7,40.509 48.75,40.509 49.7,39.559 49.85,39.559 49.9,39.509 49.95,39.509 50,39.459 50.05,39.459 50.05,39.409 50.15,39.309 50.15,38.059 47.3,35.209 47.2,35.109 47.1,35.009 47.05,35.009 v1(46.8,34.759)
  other v2: 41.75,38.659
DRV_CP1: C_CP.1 DRIVER.1 | length 2.3
  Top w0.15: DRIVER.1@53.716,30.585 53.793,30.507 55.55,30.507 C_CP.1@55.55,30.05
DRV_CP2: C_CP.2 DRIVER.2 | length 1.9
  Top w0.15: DRIVER.2@53.716,31.235 53.88,31.07 C_CP.2@55.55,31.07
DRV_EN_PULLUP: DRIVER.21 R_DRV_ENABLE_PU.1 U1.32 | length 21.7
  Top w0.1: U1.32@40.85,39.91 41.05,39.91 41.15,40.01 41.2,40.01 41.35,39.86 v1(41.7,40.21) ; R_DRV_ENABLE_PU.1@46.05,34.3 46.1,34.21 46.1,34.11 46.15,34.06 46.15,33.91 46.1,33.86 46.1,33.81 46.15,33.76 46.15,33.66 v1(46.1,33.6)
  Top w0.15: R_DRV_ENABLE_PU.1@46.05,34.3 46.05,34.15 46.1,34.1 46.1,33.95 46.05,33.9 46.05,33.85 46.1,33.8 v1(46.1,33.6) ; v1(46.8,35.4) 47.1,35.1 47.9,35.1 DRIVER.21@47.984,35.135
  Mid1 w0.1: v1(45.95,37.41) 44.25,37.41 43.75,37.91 43.7,37.91 43.6,38.01 43.55,38.01 43.5,38.06 43.25,38.06 43.2,38.01 43.15,38.01 43,37.86 43,37.81 42.95,37.76 42.95,37.46 44.7,35.71 45,35.71 45.25,35.46 45.25,35.11 45.95,34.41 45.95,34.16 46.25,33.86 46.25,33.76 v1(46.1,33.6)
  Mid2 w0.1: v1(41.7,40.21) 41.95,39.96 42,39.96 42.4,39.56 42.6,39.56 42.65,39.51 42.75,39.51 42.95,39.31 43.5,39.31 43.8,39.01 43.9,39.01 44.1,38.81 45.7,38.81 46.25,38.26 46.25,38.16 46.3,38.11 46.3,37.86 45.9,37.46 v1(45.95,37.41)
  Mid2 w0.15: v1(46.1,33.6) 46.25,33.75 46.25,35 46.3,35.05 46.35,35.05 46.55,35.25 46.65,35.25 v1(46.8,35.4)
DRV_REF_DIVIDER: C_DRV_REF.1 DRIVER.12 DRIVER.13 R_DRV_REF_BOTTOM.1 R_DRV_REF_TOP.2 | length 24.6
  Top w0.14: R_DRV_REF_BOTTOM.1@45.15,33.47 45.3,33.32 45.7,33.32
  Top w0.15: v1(42.45,35.62) 42.45,35.77 42.15,36.07 42.15,36.12 42.1,36.17 42.1,36.57 42.15,36.62 42.15,36.67 42.25,36.77 42.3,36.77 42.35,36.77 42.4,36.82 42.7,36.82 42.75,36.77 42.8,36.77 42.85,36.72 43,36.72 43.05,36.67 43.4,36.67 43.5,36.57 R_DRV_REF_TOP.2@43.8,36.57 43.8,36.87 43.9,36.97 43.9,37.32 43.95,37.37 43.95,37.47 C_DRV_REF.1@44.04,37.56 ; R_DRV_REF_BOTTOM.1@45.15,33.47 R_DRV_REF_BOTTOM.1@45.05,33.55 45.2,33.55 45.35,33.4 45.65,33.4 45.7,33.35 45.7,33.3 45.75,33.3 45.75,33.25 45.8,33.25 45.8,33.2 45.9,33.2 45.9,33.15 46.45,33.15 v1(46.8,33.5) 46.75,33.52 46.7,33.52 46.5,33.32 46.4,33.22 46.35,33.22 46.3,33.17 45.85,33.17 45.7,33.32 ; v1(51.509,38.186) 53.25,38.2 53.6,37.85 DRIVER.12@53.716,37.735 DRIVER.13@53.716,38.385
  Mid1 w0.15: v1(42.45,35.62) 42.6,35.47 42.6,35.22 42.65,35.17 42.65,35.12 43.1,34.67 43.1,33.82 43.15,33.77 43.15,33.67 43.35,33.47 43.6,33.47 45.55,33.47 45.8,33.22 45.85,33.22 45.9,33.17 46.45,33.17 46.55,33.27 46.75,33.47 v1(46.8,33.5) 47,33.7 47.1,33.7 49.3,35.9 49.35,35.9 49.4,35.95 49.5,35.95 49.55,36 49.9,36 50.3,36.4 50.3,36.8 50.35,36.85 50.35,36.9 50.4,36.95 50.4,37 51.5,38.1 v1(51.509,38.186)
DRV_V3P3: C_DRV_3V3.1 DRIVER.15 DRIVER.26 R_DRV_REF_TOP.1 | length 19.3
  Top w0.1: v1(43.05,35.4) 43.11,35.41 43.66,35.41 R_DRV_REF_TOP.1@43.8,35.55 ; C_DRV_3V3.1@45.56,39.06 45.56,38.76 45.66,38.66 45.66,38.31 45.71,38.26 45.71,38.21 v1(45.81,38.11)
  Top w0.15: v1(43.05,35.4) 43.1,35.45 43.4,35.45 43.5,35.55 R_DRV_REF_TOP.1@43.8,35.55 ; v1(44.4,30.3) 46.5,30.3 46.5,30.35 46.55,30.4 46.55,30.45 46.6,30.5 46.6,31.15 47,31.55 47.05,31.55 47.1,31.6 47.7,31.6 DRIVER.26@47.984,31.885 ; C_DRV_3V3.1@45.56,39.06 45.684,39.035 46.534,39.035 46.984,39.035 DRIVER.15@47.984,39.035
  Mid2 w0.1: v1(43.05,35.4) 43.51,35.86 43.56,35.86 44.16,36.46 ; v1@45.76,38.06 v1(45.81,38.11)
  Mid2 w0.15: v1(43.05,35.4) 44.05,34.4 44.05,31.8 44.1,31.75 44.1,31.7 44.4,31.4 v1(44.4,30.3) ; 44.16,36.46 v1@45.76,38.06
DRV_VCP: C_VCP.1 DRIVER.3 R_VCP.1 | length 16.3
  Top w0.15: DRIVER.3@53.716,31.885 54.015,31.885 54.115,31.785 54.465,31.785 54.515,31.735 55.415,31.735 55.565,31.585 56.465,31.585 56.665,31.385 56.715,31.385 C_VCP.1@57.05,31.05 57,31.05 v1(56.45,30.5) ; v1(64.65,34.05) 64.65,33.2 R_VCP.1@65.55,32.3
  Mid1 w0.15: v1(56.45,30.5) 56.5,30.5 57.6,31.6 58.3,31.6 60.15,33.45 60.2,33.45 60.35,33.6 60.4,33.6 60.45,33.65 60.5,33.65 60.55,33.7 60.6,33.7 60.65,33.75 60.7,33.75 60.75,33.8 60.8,33.8 60.85,33.85 60.9,33.85 60.95,33.9 61.05,33.9 61.1,33.95 61.25,33.95 61.3,34 61.45,34 61.5,34.05 v1(64.65,34.05)
DRV_VCP_CAP_VM: C_MOTOR_BULK.1 C_PD_VBUS.1 C_VCP.2 C_VM_BULK.1 C_VM_HF.1 C_VMA.1 D_MOTOR_BLOCK.1 D_MOTOR_TVS.1 DRIVER.4 DRIVER.11 R_VCP.2 TP_VMOTOR.1 | length 174
  Top w0.15: 54.802,32.05 54.317,32.535 54.9,32.05 ; C_VCP.2@57.05,32.07 57.243,31.842 57.474,31.61 57.474,31.495 57.653,31.316 57.653,30.88 60.519,28.014 63.27,28.014 65.115,29.859 65.137,29.837 65.499,29.837 65.755,30.093 65.755,30.455 65.733,30.477 66.057,30.8 66.057,32.699 65.892,32.863 65.55,32.863 R_VCP.2@65.55,33.32
  Top w0.2: D_MOTOR_BLOCK.1@37.608,50.81 42.4,55.61 43.4,55.61 v1(43.65,55.76) ; v1(44.05,56.86) 45.5,58.01 TP_VMOTOR.1@47.05,60.06 ; 54.802,32.05 C_VMA.1@56.05,32.05 54.9,32.05
  Top w0.3: C_MOTOR_BULK.1@28.55,41.708 28.55,41.758 28.9,42.108 28.9,42.958 ; D_MOTOR_BLOCK.1@37.608,50.81 37.65,50.908 37.65,52.058 ; D_MOTOR_TVS.1@38.95,53.71 39.15,53.91 39.4,53.91 39.45,53.96 39.8,53.96 39.9,54.06 D_MOTOR_TVS.1@40.2,54.06 ; TP_VMOTOR.1@47.05,60.06 47.25,60.26 v1(48.2,60.26)
  Top w0.31: 54.665,37.235 55.015,37.585 ; 55.015,37.585 55.065,37.585 ; 55.015,37.585 55.065,37.585 ; 55.065,37.585 C_VM_HF.1@55.55,38.07 55.065,37.585
  Top w0.34: C_VM_HF.1@55.637,37.86 55.787,37.86 56.137,38.21
  Top w0.35: 37.658,52.06 37.658,51.51 37.608,51.46 D_MOTOR_BLOCK.1@37.608,50.81 37.758,50.81 37.908,50.66 38.658,50.66 38.708,50.61 38.808,50.61 38.858,50.56 38.908,50.56 39.108,50.36 39.208,50.36 v1(39.508,50.06) ; D_MOTOR_TVS.1@39.358,53.21 40.108,53.96 D_MOTOR_TVS.1@40.2,54.06 ; v1(48.058,39.81) 48.058,40.91 47.908,41.06 C_PD_VBUS.1@47.787,41.16 48.987,41.06 49.037,41.06 ; 55.015,37.585 54.665,37.235 ; C_VM_HF.1@55.637,37.86 55.587,37.91 55.587,37.96 C_VM_HF.1@55.55,38.07 55.6,38.15 55.6,38.25 55.7,38.35 55.75,38.35 55.85,38.39 56.35,38.39 56.5,38.3 ; 56.137,38.21 56.737,38.21 v1@56.787,38.26 ; C_VCP.2@57.05,32 56.85,32 56.8,32.05 56.45,32.05 56.4,32.1 56.1,32.1 C_VMA.1@56.05,32.05 56.95,32.05 C_VCP.2@57.05,32.07 57.5,31.62 57.55,31.62 57.65,31.52 57.65,31.47 57.7,31.42 57.7,31.22 57.85,31.07 ; C_VM_BULK.1@57.3,26.598 57.4,26.72 57.4,26.77 58.1,27.47 ; DRIVER.11@54.015,37.085 DRIVER.11@53.716,37.085 DRIVER.11@54.015,37.085 ; DRIVER.11@54.015,37.085 DRIVER.11@54.115,37.185 ; DRIVER.11@54.015,37.085 DRIVER.11@54.115,37.185 ; DRIVER.11@54.115,37.185 DRIVER.11@54.465,37.185 ; DRIVER.11@54.115,37.185 DRIVER.11@54.465,37.185 ; DRIVER.11@54.465,37.185 DRIVER.11@54.515,37.235 ; DRIVER.11@54.465,37.185 DRIVER.11@54.515,37.235 ; DRIVER.11@54.515,37.235 54.665,37.235 ; DRIVER.11@54.515,37.235 54.665,37.235
  Top w0.5: DRIVER.4@53.716,32.535 54.317,32.535 DRIVER.4@53.716,32.535
  Top w0.515: 61.45,27.85 61.9,27.85 61.95,27.8 62.15,27.8 62.2,27.85 62.65,27.85 62.7,27.9
  Top w0.525: v1@56.787,38.26 v1@57.087,38.26 ; 61.75,37.75 63.65,37.75 63.7,37.8 63.85,37.8 ; 65.25,30.4 65.25,30.7 65.3,30.75 65.3,30.9
  Top w0.535: 58.6,30.3 58.6,29.9 60,28.5 60.05,28.5 ; 61.05,27.95 61.2,27.95 61.25,27.9 61.4,27.9 ; 62.85,27.9 62.9,27.95 63.05,27.95 63.1,28
  Top w0.54: 61.4,27.9 61.45,27.85 ; 62.7,27.9 62.85,27.9
  Top w0.545: 56.55,38.3 56.95,38.3 v1(57,38.25) ; 57.8,31.5 57.8,31.1 58.6,30.3 ; 65.1,29.9 65.1,30 65.15,30.05 65.15,30.15 ; 65.2,30.2 65.2,30.35 65.25,30.4
  Top w0.55: v1@58.55,38.2 v1(58.55,38.25) ; 60.65,28.1 60.75,28.1 60.8,28.05 60.85,28.05 ; 63.3,28.05 63.35,28.1 63.45,28.1 63.5,28.15 ; 65.15,30.15 65.2,30.2
  Top w0.555: 60.9,28 61,28 61.05,27.95 ; 63.1,28 63.2,28 63.25,28.05 ; 65.05,29.75 65.05,29.85 65.1,29.9
  Top w0.56: 64.8,29.3 64.8,29.35 64.9,29.45 64.9,29.5
  Top w0.565: 56.5,38.3 56.55,38.3 ; v1@58.55,38.2 58.75,38.17 58.9,38.17 ; 60.85,28.05 60.9,28 ; 63.25,28.05 63.3,28.05
  Top w0.57: 57.237,38.17 60.15,38.17 60.15,38.16 ; 60.3,28.3 60.35,28.3 60.45,28.2 60.5,28.2 ; 63.65,28.2 63.75,28.3 63.8,28.3 63.85,28.35
  Top w0.575: 57.55,31.75 57.6,31.7 57.65,31.7 57.75,31.6 57.75,31.55 57.8,31.5
  Top w0.58: 64.6,29 64.6,29.05 64.75,29.2 64.75,29.25 ; 64.95,29.55 64.95,29.6 65,29.65 65,29.7
  Top w0.585: v1@57.087,38.26 57.237,38.17 ; 57.45,31.8 57.5,31.75 57.55,31.75 ; 60.05,28.5 60.2,28.35 60.25,28.35 ; 60.15,38.16 60.637,39.01 60.15,40.01 ; 63.85,37.8 63.9,37.75 ; 63.9,28.35 64.05,28.5 64.1,28.5 64.6,29 ; 64.75,29.25 64.8,29.3 ; 64.9,29.5 64.95,29.55 ; 65,29.7 65.05,29.75
  Top w0.59: 60.25,28.35 60.3,28.3 ; 60.5,28.2 60.55,28.15 60.6,28.15 60.65,28.1 ; 63.5,28.15 63.55,28.15 63.6,28.2 63.65,28.2 ; 63.85,28.35 63.9,28.35
  Top w0.595: 65.3,30.9 v1(66,31.6)
  Top w0.6: 28.9,42.958 28.9,43.108 28.95,43.158 v1(28.95,43.258) ; 37.65,52.058 37.65,52.108 37.7,52.158 37.7,52.258 37.75,52.308 37.75,52.358 37.8,52.408 v1(37.8,52.61) 37.85,52.61 D_MOTOR_TVS.1@38.95,53.71 ; 37.658,52.06 37.658,52.16 37.708,52.21 37.708,52.31 37.908,52.51 37.958,52.51 38.008,52.56 38.058,52.56 38.108,52.61 38.658,52.61 39.058,53.01 39.158,53.01 D_MOTOR_TVS.1@39.358,53.21 ; 49.037,41.06 49.537,41.06 v1(49.687,41.21) ; C_VCP.2@57.05,32 57.2,32 57.4,31.8 57.45,31.8 ; 57.85,31.07 58.55,30.37 58.55,30.32 58.6,30.27 58.6,27.97 58.1,27.47 ; 58.9,38.17 61.25,38.17 61.3,38.05 61.4,38.05 61.45,38 61.5,38 61.75,37.75 ; v1(59.637,40.41) 60.15,40.01 ; 63.9,37.75 63.95,37.75 64.05,37.65 64.1,37.65 64.2,37.55 64.2,37.5 64.3,37.4 64.3,37.25 64.35,37.2 v1(64.35,37.15)
  Bottom w0.2: v1(43.65,55.76) 43.65,56.46 v1(44.05,56.86)
  Bottom w0.3: 36.45,51.258 37.2,52.008 ; 47,61.66 47.55,60.71 47.75,60.71 v1(48.2,60.26)
  Bottom w0.35: 45.908,41.71 46.508,41.11 46.508,40.81 46.708,40.61 47.308,40.61 47.958,39.96 47.958,39.91 v1(48.058,39.81)
  Bottom w0.535: 44.6,63.31 45.15,63.31 45.2,63.26
  Bottom w0.545: 44.45,63.26 44.55,63.26 44.6,63.31 ; 45.2,63.26 45.3,63.26 45.35,63.21
  Bottom w0.575: 43.3,63.29 44.4,63.21 44.45,63.26 ; 45.35,63.21 45.4,63.21 45.5,63.11 45.55,63.11 46.95,61.71
  Bottom w0.6: v1(28.95,43.258) 30.8,45.108 30.8,48.958 30.85,49.008 30.85,49.058 30.9,49.108 30.9,49.158 31.5,49.758 31.5,50.158 31.55,50.208 31.55,50.308 31.8,50.558 31.85,50.558 31.9,50.608 31.95,50.608 32,50.658 34.3,50.658 34.5,50.858 34.55,50.858 34.65,50.958 34.7,50.958 34.75,51.008 34.8,51.008 34.85,51.058 36.25,51.058 36.45,51.258 ; 37.2,52.008 37.75,52.558 v1(37.8,52.61) 31.2,52.61 30.9,52.91 30.9,52.96 30.85,53.01 30.85,53.16 30.8,53.21 30.8,53.41 30.85,53.46 30.85,53.61 30.9,53.66 30.9,53.71 31.1,53.91 31.15,53.91 31.2,53.96 31.3,53.96 31.35,54.01 31.45,54.01 32.3,54.86 32.35,54.86 32.4,54.91 33.4,54.91 36.3,57.81 36.35,57.81 36.45,57.91 36.5,57.91 36.55,57.96 36.6,57.96 39.2,60.56 39.25,60.56 39.35,60.66 39.45,60.66 39.5,60.71 41,60.71 43,63.19 43.05,63.19 43.1,63.24 43.25,63.24 43.3,63.29 ; v1(39.508,50.06) 41.608,47.96 41.608,47.36 43.858,45.11 43.858,43.01 43.908,42.96 43.908,42.86 43.958,42.81 43.958,42.76 44.008,42.71 44.008,42.66 44.158,42.51 44.208,42.51 44.258,42.46 44.308,42.46 44.358,42.41 45.208,42.41 45.908,41.71 ; 46.95,61.71 47,61.66 ; v1(49.687,41.21) 54.787,41.21 54.837,41.26 54.887,41.26 54.937,41.31 58.237,41.31 58.287,41.26 58.787,41.26 v1(59.637,40.41) ; v1(57,38.25) v1(58.55,38.25) ; v1(64.35,37.15) 64.35,35.3 65.25,34.4 65.25,34.35 65.3,34.3 65.3,34.2 65.35,34.15 65.35,33.35 65.45,33.25 65.45,33.2 65.55,33.1 65.55,33.05 65.6,33 65.6,32.95 65.65,32.9 65.65,32.85 65.7,32.8 65.7,32.75 65.75,32.7 65.75,32.6 65.8,32.55 65.8,32.45 65.85,32.4 65.85,32.3 65.9,32.25 65.9,32.1 65.95,32.05 65.95,31.9 66,31.85 v1(66,31.6)
EN_R: R_3V3_EN.2 U3.3 | length 4
  Top w0.15: U3.3@28.45,54.11 29.511,54.11 30.47,55.07 R_3V3_EN.2@32.05,55.07
ENCODER_SCL: R_ENC_SCL.1 U1.3 U_ENCODER.7 | length 26.8
  Top w0.15: v1(33.15,43.16) U1.3@34,43.11 ; R_ENC_SCL.1@38.04,49.31 v1(38.55,49.96) 38.54,49.91 38.54,49.81 R_ENC_SCL.1@38.04,49.31
  Mid1 w0.15: v1(33.15,43.16) 33.85,44.36 33.85,45.11 v1(38.55,49.96)
  Mid2 w0.15: v1(38.55,49.96) 38.59,50.01 38.69,50.11 40.39,51.81 40.39,51.96 40.44,52.01 40.44,52.06 40.59,52.21 40.64,52.21 40.69,52.26 41.74,52.26 41.94,52.46 41.99,52.46 42.04,52.51 42.09,52.51 42.14,52.56 42.99,52.56 43.74,53.31 43.79,53.31 43.84,53.36 43.89,53.36 43.94,53.41 45.24,53.41 45.44,53.61 45.49,53.61 45.54,53.66 45.89,53.66 45.94,53.61 45.99,53.61 46.09,53.51 46.09,53.46 46.14,53.41 46.14,52.21 46.09,52.16 46.09,52.11 45.99,52.01 45.99,51.21 v1(45.19,50.41)
  Bottom w0.15: v1(45.19,50.41) 45.69,50.41 45.74,50.46 46.09,50.46 46.14,50.41 46.19,50.41 46.39,50.21 46.39,50.06 46.49,49.96 47.09,49.36 U_ENCODER.7@47.185,49.265
ENCODER_SDA: R_ENC_SDA.1 U1.2 U_ENCODER.6 | length 40.9
  Top w0.15: v1(32.8,43.76) 32.9,43.66 33,43.66 33.2,43.66 33.25,43.61 33.6,43.61 33.7,43.51 U1.2@34,43.51 ; R_ENC_SDA.1@41.04,59.56 41.69,60.11 42.49,60.06 42.99,59.96 v1(45.24,58.46)
  Mid1 w0.15: v1(32.8,43.76) 32.8,44.36 32.45,44.71 32.45,45.96 32.55,46.06 32.55,46.11 32.8,46.36 32.8,46.51 32.9,46.61 32.9,46.66 32.95,46.71 33,46.71 33.05,46.76 33.4,46.76 34.8,48.16 34.8,48.36 34.9,48.46 34.9,48.51 34.95,48.51 35,48.56 35.05,48.56 35.1,48.61 36.1,48.61 38.1,50.61 38.15,50.61 38.2,50.66 38.3,50.66 38.35,50.71 38.65,50.71 v1(39.25,51.31) ; v1(44.75,51.31) 44.75,50.21 44.8,50.16 44.8,50.11 45.1,49.81 45.15,49.76 45.15,48.61 45.15,48.46 v1(45.3,48.31)
  Mid2 w0.15: v1(45.24,58.46) 45.59,57.86 46.74,56.71 46.74,56.01 47.39,55.41 47.44,51.26 47.24,50.91 v1(46.84,47.91)
  Bottom w0.15: v1(39.25,51.31) v1(44.75,51.31) ; v1(45.3,48.31) 45.3,48.51 45.3,48.66 45.8,49.16 U_ENCODER.6@45.915,49.265 v1(46.84,47.91)